# EAGLE board RasPiTimePowerSWv.1.6 (EAGLE 8.3.2)
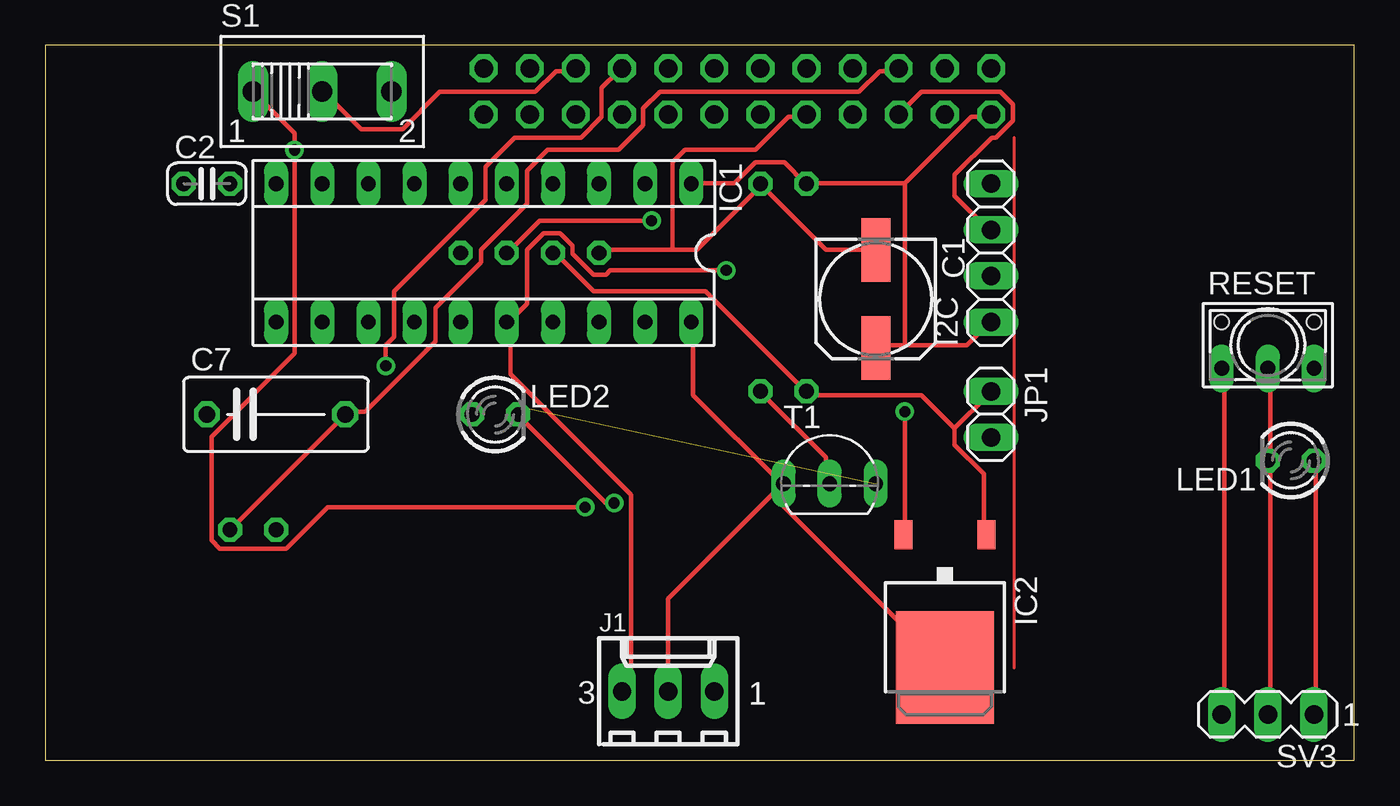
[diagram p0: board, top side]
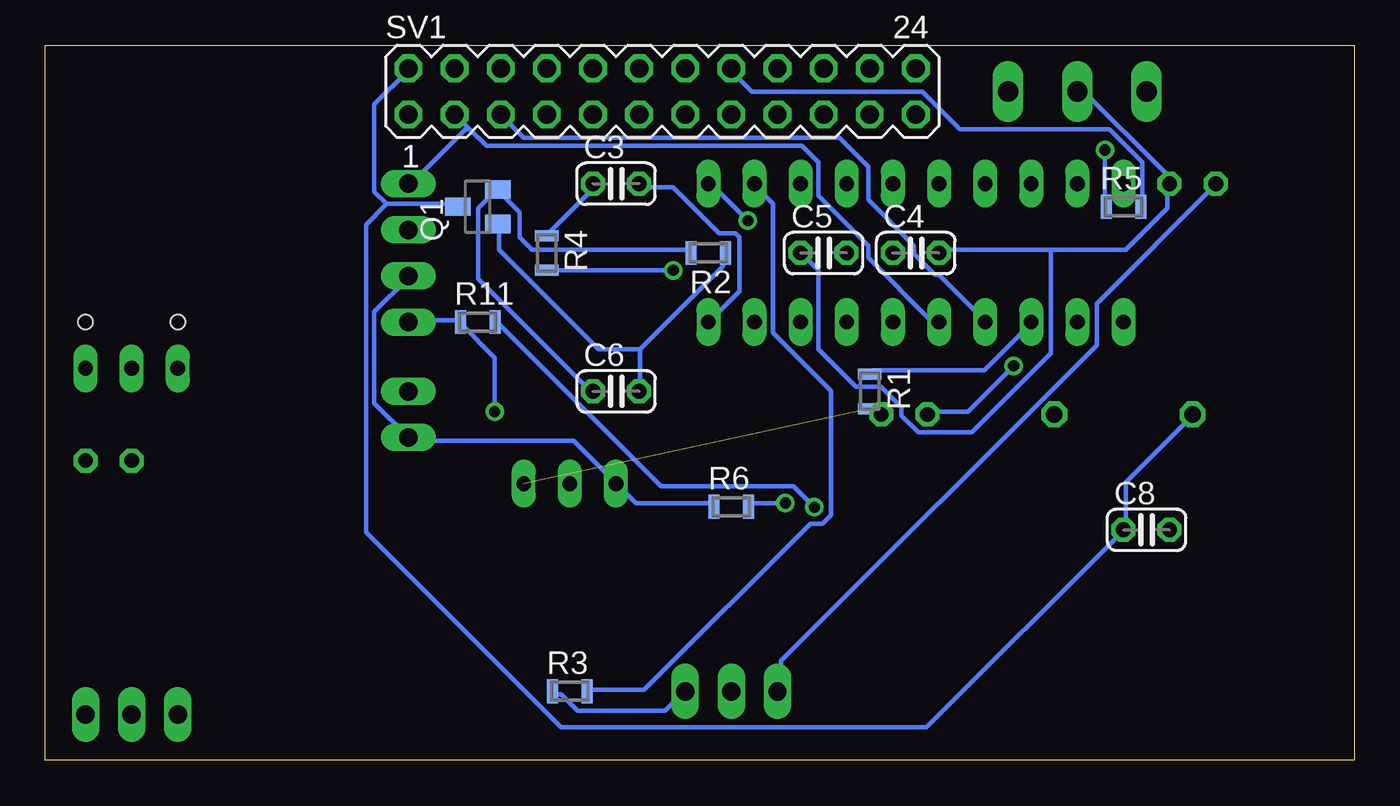
[diagram p1: board, bottom side, seen from below]

Size 72.06 x 39.36 mm. Coordinates in mm from the lower left corner, seen from the top.
Outline: 0,0 72.06,0 72.06,39.36 0,39.36 0,0
Copper layers (1*16): Top 0.035mm / dielectric 1.5mm / Bottom 0.035mm
Design rules "default": minimum track width 10mil, minimum drill 24mil, track to track 8mil, track to pad 8mil, pad to pad 8mil, via to via 8mil, smd to smd 8mil, copper to edge 40mil, drill to drill 8mil, minimum pad ring 10mil, minimum via ring 8mil, stop-mask expansion 4mil, vias tented up to drill 0mil, thermal gap 10mil

## Footprints (pad centres in the part's own frame; a part is rotated, then mirrored left to right if it is on the bottom)
153CLV-0605 = smd 3.5 x 1.6: + 2.7,0; - -2.7,0
C025-024X044 = drill 0.813 octagon: 1 -1.27,0; 2 1.27,0
C075-042X103 = drill 0.914 octagon: 1 -3.81,0; 2 3.81,0
1X04 = drill 1.016 long: 1 -3.81,0; 2 -1.27,0; 3 1.27,0; 4 3.81,0
SOCKET-20 = drill 0.813 long: 1 -11.43,-3.81; 2 -8.89,-3.81; 3 -6.35,-3.81; 4 -3.81,-3.81; 5 -1.27,-3.81; 6 1.27,-3.81; 7 3.81,-3.81; 8 6.35,-3.81; 9 8.89,-3.81; 10 11.43,-3.81; 11 11.43,3.81; 12 8.89,3.81; 13 6.35,3.81; 14 3.81,3.81; 15 1.27,3.81; 16 -1.27,3.81; 17 -3.81,3.81; 18 -6.35,3.81; 19 -8.89,3.81; 20 -11.43,3.81
TO252 = smd 1 x 1.6: 1 -2.28,-4.8; 2 2.28,-4.8 | smd 5.4 x 6.2: 3 0,2.5
6410-03 = drill 1.016 long: 1 2.54,0; 2 0,0; 3 -2.54,0
1X02 = drill 1.016 long: 1 -1.27,0; 2 1.27,0
LED3MM = drill 0.813 octagon: A -1.27,0; K 1.27,0
SOT23 = smd 1 x 1.4: 1 -0.95,-1.1; 2 0.95,-1.1; 3 0,1.1
MINI_MELF-0102W = smd 0.6 x 1.3: 1 -0.95,0; 2 0.95,0
9450-1 = drill 0.813 long: 1 -2.54,-1.27; 2 0,-1.27; 3 2.54,-1.27 | hole 0.813: 2.54,1.27; -2.54,1.27
255SB = drill 1.118 long: 1 -3.81,0; 2 0,0; 3 3.81,0
MA12-2 = drill 1.016 octagon: 1 -13.97,-1.27; 2 -13.97,1.27; 3 -11.43,-1.27; 4 -11.43,1.27; 5 -8.89,-1.27; 6 -8.89,1.27; 7 -6.35,-1.27; 8 -6.35,1.27; 9 -3.81,-1.27; 10 -3.81,1.27; 11 -1.27,-1.27; 12 -1.27,1.27; 13 1.27,-1.27; 14 1.27,1.27; 15 3.81,-1.27; 16 3.81,1.27; 17 6.35,-1.27; 18 6.35,1.27; 19 8.89,-1.27; 20 8.89,1.27; 21 11.43,-1.27; 22 11.43,1.27; 23 13.97,-1.27; 24 13.97,1.27
MA03-1 = drill 1.016 long: 1 -2.54,0; 2 0,0; 3 2.54,0
TO92-ECB = drill 0.813 long: B 2.54,0; C 0,0; E -2.54,0

## Placement (x,y rotation side)
C1  47μF 16V  [153CLV-0605]  45.72,25.4 270 top
C2  1nF(102)  [C025-024X044]  8.89,31.75 0 top
C3  1nF(102)  [C025-024X044]  40.64,31.75 0 bottom
C4  0.1μF(104)  [C025-024X044]  24.13,27.94 0 bottom
C5  0.33μF  [C025-024X044]  29.21,27.94 0 bottom
C6  0.1μF(104)  [C025-024X044]  40.64,20.32 0 bottom
C7  47μF 16V  [C075-042X103]  12.7,19.05 0 top
C8  0.1μF(104)  [C025-024X044]  11.43,12.7 0 bottom
I2C  [1X04]  52.07,27.94 90 top
IC1  MSP430G2553  [SOCKET-20]  24.13,27.94 180 top
IC2  NJM2845DL1-33  [TO252]  49.53,7.62 180 top
J1  3P Socket  [6410-03]  34.29,3.81 0 top
JP1  [1X02]  52.07,19.05 270 top
LED1  [LED3MM]  68.58,16.51 180 top
LED2  TLLG4400  [LED3MM]  24.77,19.05 0 top
Q1  P-ch MOS FET  [SOT23]  48.26,30.48 90 bottom
R1  [MINI_MELF-0102W]  26.67,20.32 270 bottom
R2  [MINI_MELF-0102W]  35.56,27.94 180 bottom
R3  [MINI_MELF-0102W]  43.18,3.81 0 bottom
R4  10kΩ  [MINI_MELF-0102W]  44.45,27.94 270 bottom
R5  [MINI_MELF-0102W]  12.7,30.48 0 bottom
R6  [MINI_MELF-0102W]  34.29,13.97 0 bottom
R11  10kΩ  [MINI_MELF-0102W]  48.26,24.13 0 bottom
RESET  Reset SW  [9450-1]  67.31,22.86 0 top
S1  program switch  [255SB]  15.24,36.83 0 top
SV1  [MA12-2]  38.1,36.83 0 bottom
SV3  [MA03-1]  67.31,2.54 180 top
T1  2SC1815-Y  [TO92-ECB]  43.18,15.24 0 top

## Library data of the parts
C1-C8 R4 R11 = resistor
I2C JP1 = pinhead
IC1 = ic-package
IC2 = linear
J1 = con-molex; OC_FARNELL: unknown; OC_NEWARK: unknown
LED1 LED2 = led; MF: VISHAY SEMICONDUCTOR; OC_FARNELL: 1612435
Q1 = transistor-small-signal
R1 = resistor; R: 10kΩ
R2 = resistor; 1K: 23.5kΩ
R3 R6 = resistor; R: 200Ω
R5 = resistor; 1K: 1kΩ
RESET = switch-misc
S1 = switch
SV1 SV3 = con-lstb; OC_FARNELL: unknown; OC_NEWARK: unknown
T1 = transistor

## Nets
3.3V: C1.+ C3.1 C4.1 I2C.1 IC1.1 IC2.2 R4.1 R11.1 SV1.1
5V: C7.1 C8.1 Q1.3 SV1.2
5VIN: C5.2 C6.1 IC2.1 JP1.1 Q1.2 R2.2
GND: C1.- C2.2 C3.2 C4.2 C5.1 I2C.2 IC1.20 IC2.3 J1.2 JP1.2 R6.1 S1.2 SV1.9 SV1.20 T1.E
N$1: R1.2 T1.B
N$2: IC1.13 R1.1
N$3: R5.2 SV1.16
N$4: IC1.2 R3.2
N$5: R5.1 R11.2 S1.1
N$6: C6.2 Q1.1 R2.1 T1.C
N$7: SV1.21
N$8: C7.2 C8.2 SV1.6
N$9: LED2.A SV1.18
N$10: LED2.K R6.2
N$11: RESET.1 SV3.3
N$12: LED1.A SV3.1
N$13: SV1.17
N$14: SV1.24
N$25: LED1.K RESET.2 SV3.2
N$26: J1.1 R3.1
RESET: C2.1 IC1.16 J1.3 R4.2
SCL: I2C.3 IC1.14 SV1.5
SDA: I2C.4 IC1.15 SV1.3

## Tracks (layer width: path | path; a pad name or v marks a point on that pad's centre or on a via)
3.3V  (via drill 0.61)
  Top 0.254: v47.32,19.2 47.32,12.57 IC2.2 | 47.32,22.86 50.75,22.86 51.89,24 I2C.1 | 47.32,22.86 45.72,22.86 C1.+ | v33.38,29.72 27.2,29.72 25.6,28.12 C4.1 | 47.32,31.77 50.98,35.43 51.89,35.43 SV1.1 | 47.32,31.77 42.06,31.77 C3.1 41.83,31.77 40.69,32.92 39.09,32.92 37.95,31.77 35.66,31.77 IC1.1 | 47.32,31.77 47.32,22.86
  Bottom 0.254: I2C.1 51.89,24.23 49.38,24.23 R11.1 49.15,24 47.32,22.17 v47.32,19.2 | v33.38,29.72 35.43,31.77 IC1.1 | R4.1 44.35,29.03 41.83,31.55 C3.1
5V
  Bottom 0.254: 53.26,30.63 49.38,30.63 Q1.3 | 53.26,30.63 53.95,31.32 53.95,36.12 52.12,37.95 SV1.2 | C7.1 8.91,18.97 12.57,15.32 12.57,12.8 C8.1 12.8,12.57 23.55,1.83 43.66,1.83 54.41,12.57 54.41,29.49 53.26,30.63
5VIN
  Top 0.254: 50.06,18.29 50.06,17.37 51.66,15.77 51.66,12.57 IC2.1 | 50.06,18.29 51.89,20.12 JP1.1 | 50.06,18.29 48.23,20.12 42.06,20.12 C6.1 41.83,20.34 36.35,25.83 30.18,25.83 28.12,27.89 C5.2
  Bottom 0.254: R2.2 36.58,28.12 45.26,28.12 45.95,28.8 45.95,30.18 47.09,31.32 Q1.2 47.32,31.32 48.23,30.4 48.23,26.52 42.06,20.34 C6.1
GND
  Top 0.254: SV1.20 29.03,37.95 28.12,37.95 26.98,36.8 21.72,36.8 19.66,34.75 17.37,34.75 15.32,36.8 S1.2 | 34.52,28.12 35.89,28.12 39.32,31.55 C3.2 39.55,31.55 42.98,28.12 45.72,28.12 C1.- | 34.52,28.12 30.63,28.12 C5.1 | 34.52,28.12 34.52,32.92 35.2,33.6 39.09,33.6 40.92,35.43 41.83,35.43 SV1.9 | IC1.20 35.66,24 35.66,20.12 40.46,15.32 T1.E | J1.2 34.29,8.91 40.01,14.63 | 40.01,14.63 40.46,15.09 T1.E | 40.01,14.63 49.38,5.26 IC2.3 | 40.01,14.63 T1.E
  Bottom 0.254: 16.69,28.12 12.57,28.12 10.29,30.4 10.29,31.55 C2.2 10.29,31.77 10.29,32.23 15.09,37.03 S1.2 | 16.69,28.12 22.86,28.12 C4.2 | I2C.2 52.12,26.52 53.95,24.69 53.95,19.66 JP1.2 51.89,17.6 42.98,17.6 40.69,15.32 T1.E 40.46,15.09 39.55,14.17 35.43,14.17 R6.1 | C3.2 39.32,31.55 37.49,31.55 34.98,29.03 34.06,29.03 33.83,28.8 33.83,25.83 35.43,24.23 IC1.20 | 16.69,28.12 16.69,22.4 21.03,18.06 24,18.06 24.92,18.97 24.92,19.43 26.06,20.57 27.43,20.57 29.49,22.63 29.49,26.98 30.4,27.89 C5.1
N$1  (1 unrouted)
N$2
  Bottom 0.254: R1.1 26.52,21.49 20.34,21.49 17.83,24 IC1.13
N$3
  Bottom 0.254: R5.2 11.66,30.63 11.66,32.92 13.49,34.75 21.72,34.75 23.77,36.8 33.15,36.8 34.29,37.95 SV1.16
N$4
  Bottom 0.254: R3.2 42.06,3.89 39.09,3.89 29.95,13.03 29.26,13.03 28.8,13.49 28.8,20.34 32,23.55 32,30.63 32.92,31.55 IC1.2
N$5  (via drill 0.61)
  Top 0.254: S1.1 11.43,36.8 13.72,34.52 v13.72,33.6 13.72,22.4 9.14,17.83 9.14,12.12 9.6,11.66 13.26,11.66 15.54,13.95 v29.72,13.95
  Bottom 0.254: v13.72,33.6 13.72,30.63 R5.1 | v29.72,13.95 30.86,15.09 38.18,15.09 47.09,24 R11.2
N$6
  Top 0.254: T1.C 42.98,15.32 42.98,16.69 39.55,20.12 C6.2
  Bottom 0.254: 39.32,22.63 34.75,27.2 34.75,27.89 R2.1 | 39.32,22.63 39.32,20.34 C6.2 | 39.32,22.63 41.6,22.63 47.09,28.12 47.09,29.49 Q1.1
N$8
  Top 0.254: C8.2 10.29,12.8 16.46,18.97 C7.2 16.69,19.2 17.6,19.2 21.49,23.09 21.49,24.92 24,27.43 24,28.12 26.52,30.63 26.52,32.46 27.66,33.6 31.55,33.6 32.92,34.98 32.92,35.89 33.83,36.8 44.81,36.8 45.95,37.95 46.86,37.95 SV1.6
N$9  (via drill 0.61)
  Top 0.254: v18.75,21.72 18.75,22.86 19.2,23.32 19.2,25.83 24.23,30.86 24.23,32.69 25.83,34.29 29.49,34.29 30.63,35.43 30.63,37.03 31.55,37.95 SV1.18
  Bottom 0.254: v18.75,21.72 21.26,19.2 23.32,19.2 LED2.A
N$10  (via drill 0.61)
  Top 0.254: v31.32,14.17 30.86,14.17 26.06,18.97 LED2.K
  Bottom 0.254: v31.32,14.17 33.15,14.17 R6.2
N$11
  Top 0.254: RESET.1 64.92,21.49 64.92,2.74 SV3.3
N$12
  Top 0.254: LED1.A 69.95,16.46 69.95,2.74 SV3.1
N$15
  Top 0.152: 53.34,34.29 53.34,5.08
N$25
  Top 0.254: RESET.2 67.44,21.49 67.44,16.69 LED1.K 67.44,16.46 67.44,2.74 SV3.2
N$26
  Bottom 0.254: R3.1 44.12,3.66 43.66,3.66 42.75,2.74 37.95,2.74 37.03,3.66 J1.1
RESET  (via drill 0.61)
  Top 0.254: v37.49,26.98 31.09,26.98 30.86,26.75 30.18,26.75 29.03,27.89 29.03,28.35 28.35,29.03 27.43,29.03 26.52,28.12 26.52,25.15 25.6,24.23 IC1.16 25.6,24 25.6,21.26 32.23,14.63 32.23,4.34 31.77,3.89 J1.3
  Bottom 0.254: v37.49,26.98 44.35,26.98 R4.2 | C2.1 7.77,31.55 14.17,25.15 14.17,22.86 31.55,5.49 31.55,3.89 J1.3
SCL
  Top 0.254: SV1.5 48.23,36.8 52.58,36.8 53.26,36.12 53.26,35.2 52.35,34.29 52.12,34.29 50.06,32.23 50.06,31.09 51.89,29.26 I2C.3
  Bottom 0.254: SV1.5 45.72,34.29 28.35,34.29 26.75,32.69 26.75,30.86 24.23,28.35 24.23,27.89 23.09,26.75 22.86,26.75 20.34,24.23 IC1.14
SDA
  Bottom 0.254: 48.69,34.75 49.38,35.43 SV1.3 | 48.69,34.75 47.78,33.83 30.4,33.83 29.49,32.92 29.49,31.09 26.75,28.35 26.75,27.66 23.32,24.23 22.86,24.23 IC1.15 | 48.69,34.75 48.92,34.75 51.89,31.77 I2C.4